# EAGLE board me_433_hw3 (EAGLE 8.7.1)
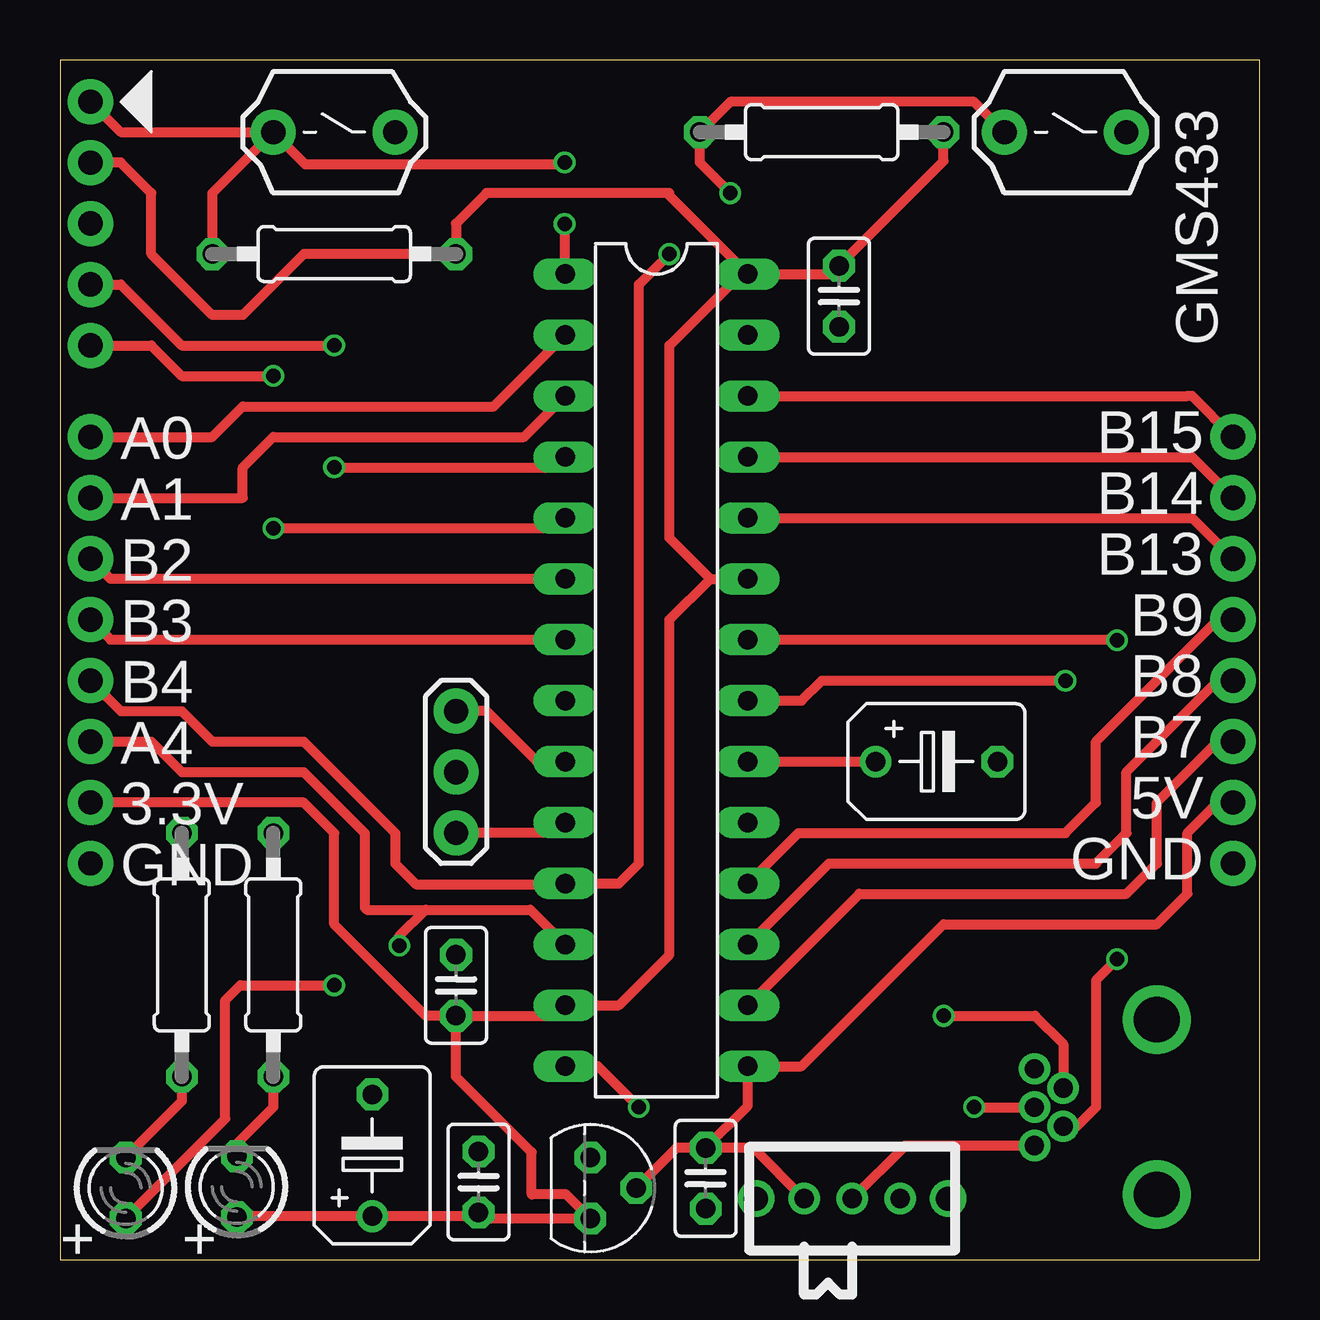
[diagram p0: board, top side]
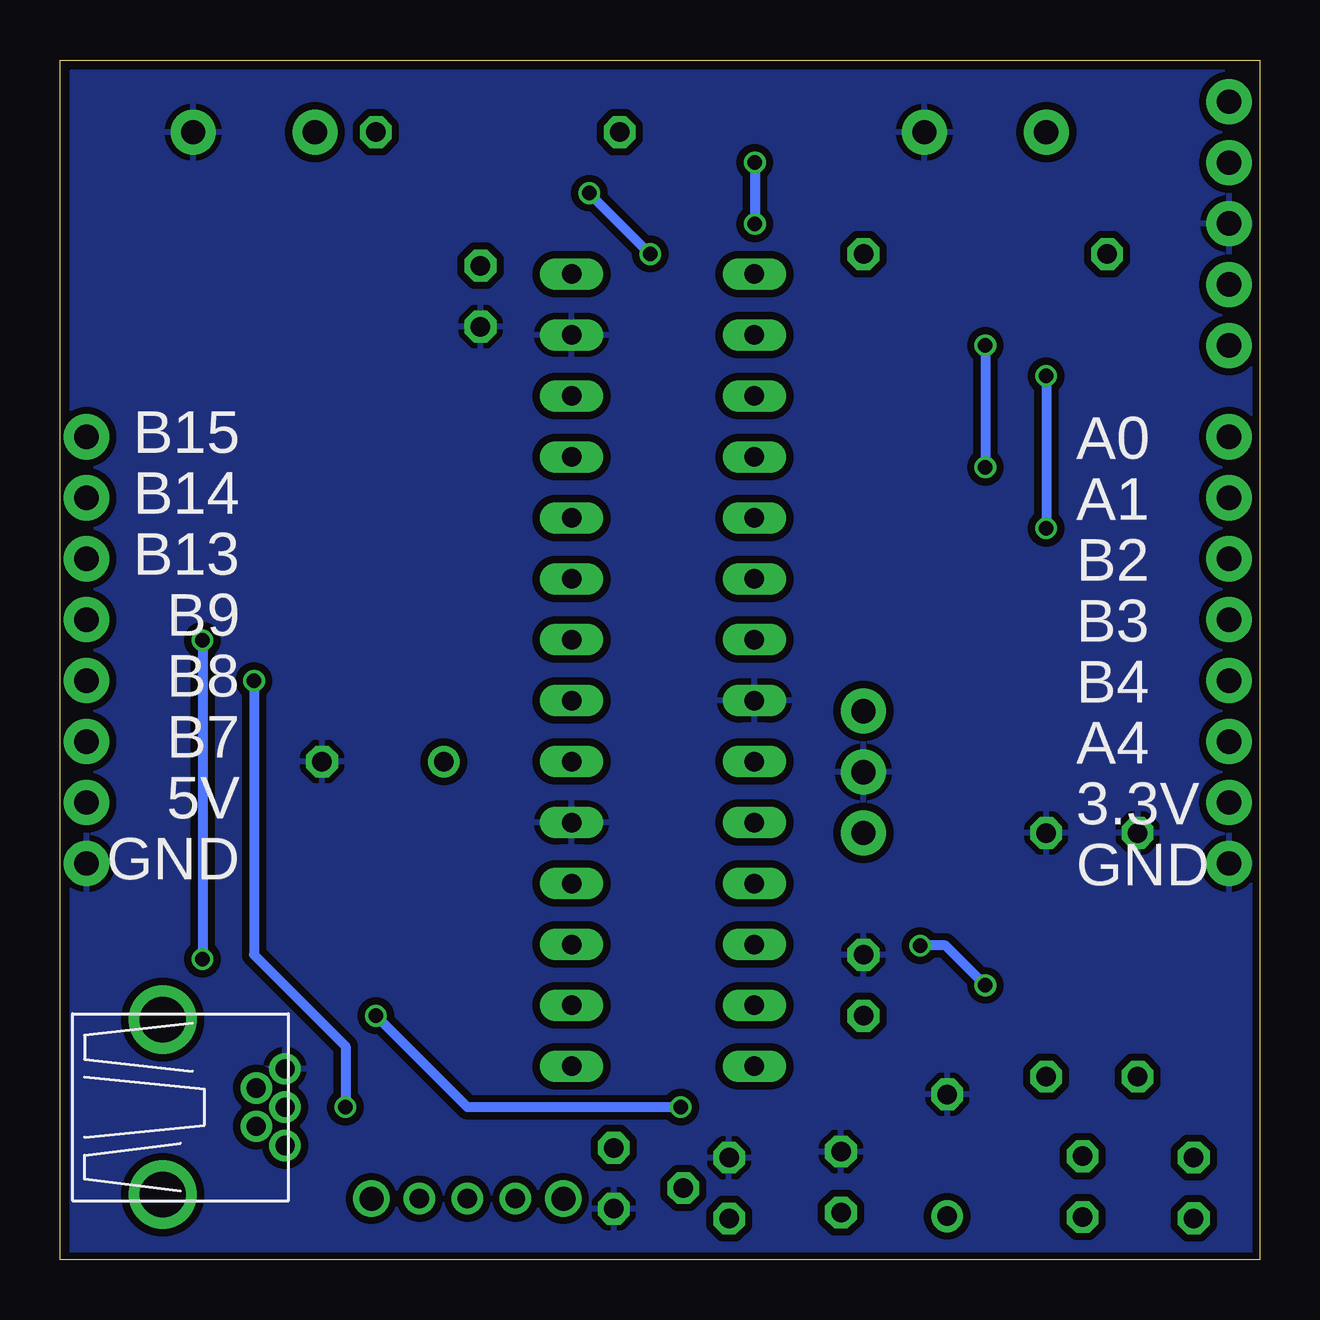
[diagram p1: board, bottom side, seen from below]

Size 50 x 50 mm. Coordinates in mm from the lower left corner, seen from the top.
Outline: 0,0 50,0 50,50 0,50 0,0
Copper layers (1*16): Top 0.035mm / dielectric 1.5mm / Bottom 0.035mm
Design rules "SeeedStudio_2layer_DRU_no_angle_20140221": minimum track width 6mil, minimum drill 12mil, track to track 6mil, track to pad 6mil, pad to pad 6mil, via to via 6mil, smd to smd 0mil, copper to edge 10mil, drill to drill 10mil, minimum pad ring 10mil, minimum via ring 6mil, stop-mask expansion 2mil, vias tented up to drill 100mil, thermal gap 10mil

## Footprints (pad centres in the part's own frame; a part is rotated, then mirrored left to right if it is on the bottom)
C025-025X050 = drill 0.813 octagon: 1 -1.27,0; 2 1.27,0
B45181B = drill 0.813: + -2.54,0 | drill 0.813 octagon: - 2.54,0
USB-MB-H = drill 0.8: D+ 5.1,0; D- 3.9,0.8; GND 5.1,-1.6; ID 3.9,-0.8; VBUS 5.1,1.6 | drill 1.9: P$6 0,-3.65; P$7 0,3.65
1X08 = drill 1.016 pad 1.88: 1 0,0; 2 2.54,0; 3 5.08,0; 4 7.62,0; 5 10.16,0; 6 12.7,0; 7 15.24,0; 8 17.78,0
LED3MM = drill 0.813 octagon: A -1.27,0; K 1.27,0
0207/10 = drill 0.813 octagon: 1 -5.08,0; 2 5.08,0
DIL28-3 = drill 0.813 long: 1 -16.51,-3.81; 2 -13.97,-3.81; 3 -11.43,-3.81; 4 -8.89,-3.81; 5 -6.35,-3.81; 6 -3.81,-3.81; 7 -1.27,-3.81; 8 1.27,-3.81; 9 3.81,-3.81; 10 6.35,-3.81; 11 8.89,-3.81; 12 11.43,-3.81; 13 13.97,-3.81; 14 16.51,-3.81; 15 16.51,3.81; 16 13.97,3.81; 17 11.43,3.81; 18 8.89,3.81; 19 6.35,3.81; 20 3.81,3.81; 21 1.27,3.81; 22 -1.27,3.81; 23 -3.81,3.81; 24 -6.35,3.81; 25 -8.89,3.81; 26 -11.43,3.81; 27 -13.97,3.81; 28 -16.51,3.81
SLIDE = drill 0.8: 1 -2,0; 2 0,0; 3 2,0 | drill 1: P$1 -4,0; P$2 4,0
TO92 = drill 0.813 octagon: 1 -1.27,0; 2 0,1.905; 3 1.27,0
PB = drill 1.016 pad 1.88: 1 0,0; 2 5.08,0
1X05 = drill 1.016 pad 1.88: 1 0,0; 2 2.54,0; 3 5.08,0; 4 7.62,0; 5 10.16,0
OSC = drill 1.016 pad 1.88: 1 0,0; 2 2.54,0; 3 5.08,0

## Placement (x,y rotation side)
C1  0.1uF  [C025-025X050]  32.47,40.16 270 top
C2  0.1uF  [C025-025X050]  16.51,11.43 90 top
C3  0.1uF  [C025-025X050]  26.91,3.38 270 top
C4  0.1uF  [C025-025X050]  17.45,3.23 90 top
C5  10uF  [B45181B]  36.53,20.75 0 top
C6  10uF  [B45181B]  13.02,4.34 90 top
J1  USB-MB-H  [USB-MB-H]  45.72,6.35 180 top
J2  [1X08]  1.27,16.51 90 top
J3  [1X08]  48.9,16.51 90 top
LED1  Red  [LED3MM]  7.37,3.04 90 top
LED2  Green  [LED3MM]  2.74,2.98 90 top
R1  330  [0207/10]  8.89,12.7 270 top
R2  330  [0207/10]  5.08,12.7 270 top
R3  10k  [0207/10]  11.43,41.91 0 top
R4  10k  [0207/10]  31.75,46.99 0 top
U$1  PIC32MX250F128B  [DIL28-3]  24.86,24.57 270 top
U$2  SLIDE  [SLIDE]  33.02,2.54 180 top
U$3  MCP1702  [TO92]  22.11,2.98 270 top
U$4  RESET  [PB]  8.89,46.99 0 top
U$5  USER  [PB]  39.37,46.99 0 top
U$6  PICKIT3  [1X05]  1.27,48.26 270 top
U$7  8MHZ  [OSC]  16.51,22.86 270 top

## Library data of the parts
C1-C6 J1-J3 R1-R4 U$1-U$7 = me_433_hw2_library
LED1 LED2 = led

## Nets
+3V3: C1.1 C2.1 C4.1 C6.+ J2.2 LED1.A R3.2 R4.2 U$1.13 U$1.23 U$1.28 U$3.3 U$6.2
+5V: C3.1 J3.2 U$1.15 U$2.3 U$3.2
A0: J2.8 U$1.2
A1: J2.7 U$1.3
A4/LED: J2.3 LED2.A U$1.12
B2: J2.6 U$1.6
B3: J2.5 U$1.7
B4/USER: J2.4 R4.1 U$1.11 U$5.1
B7: J3.3 U$1.16
B8: J3.4 U$1.17
B9: J3.5 U$1.18
B13: J3.6 U$1.24
B14: J3.7 U$1.25
B15: J3.8 U$1.26
D+: J1.D+ U$1.21
D-: J1.D- U$1.22
GND: C1.2 C2.2 C3.2 C4.2 C5.- C6.- J1.GND J2.1 J3.1 R1.1 R2.1 U$1.8 U$1.19 U$1.27 U$3.1 U$4.2 U$5.2 U$6.3 U$7.2
MCLR: R3.1 U$1.1 U$4.1 U$6.1
N$1: J1.VBUS U$2.2
N$2: U$1.9 U$7.1
N$3: U$1.10 U$7.3
N$4: LED1.K R1.2
N$5: C5.+ U$1.20
N$6: LED2.K R2.2
PGC: U$1.5 U$6.5
PGD: U$1.4 U$6.4
USBID: J1.ID U$1.14

## Tracks (layer width: path | path; a pad name or v marks a point on that pad's centre or on a via)
+3V3
  Top 0.406: LED1.A 7.41,1.8 C6.+ 17.29,1.8 C4.1 17.7,1.71 U$3.3 21.1,2.71 19.66,2.71 19.66,4.47 16.51,7.62 C2.1 | C2.1 20.62,10.16 U$1.13 23.3,10.6 25.4,12.7 25.4,26.67 27.11,28.38 | C2.1 15.24,10.16 11.43,13.97 11.43,17.78 10.16,19.05 J2.2 | 27.11,28.38 U$1.23 | 27.11,28.38 25.4,30.08 25.4,38.1 28.38,41.08 U$1.28 | U$1.28 32.12,41.08 C1.1 36.83,45.78 R4.2 | U$6.2 2.54,45.72 3.81,44.45 3.81,41.91 6.35,39.37 7.62,39.37 10.16,41.91 R3.2 16.51,43.18 17.78,44.45 25.4,44.45 25.4,44.35 U$1.28
+5V
  Top 0.406: U$2.3 28.91,4.66 C3.1 | C3.1 25.7,4.66 U$3.2 | C3.1 28.68,6.42 U$1.15 30.91,8.05 36.83,13.97 45.72,13.97 46.99,15.24 46.99,17.78 48.26,19.05 48.78,19.05 J3.2
A0
  Top 0.406: J2.8 6.35,34.29 7.62,35.56 18.08,35.56 U$1.2
A1
  Top 0.406: J2.7 7.62,31.75 7.62,33.02 8.89,34.29 19.35,34.29 U$1.3
A4/LED  (via drill 0.6)
  Top 0.406: J2.3 3.81,21.59 5.08,20.32 10.16,20.32 12.7,17.78 12.7,14.67 12.79,14.58 15.24,14.58 | 15.24,14.58 19.61,14.58 U$1.12 | LED2.A 6.89,5.87 6.89,10.81 7.51,11.43 v11.43,11.43 | v14.14,13.09 14.14,13.48 15.24,14.58
  Bottom 0.406: v11.43,11.43 13.09,13.09 v14.14,13.09
B2
  Top 0.406: U$1.6 2.1,28.38 J2.6
B3
  Top 0.406: J2.5 2.1,25.84 U$1.7
B4/USER  (via drill 0.6)
  Top 0.406: U$5.1 38.1,48.26 27.94,48.26 R4.1 26.67,45.72 v27.94,44.45 | J2.4 2.54,22.86 5.08,22.86 6.35,21.59 10.16,21.59 13.97,17.78 13.97,16.51 14.84,15.64 21.02,15.64 U$1.11 23.3,15.68 24.13,16.51 24.13,40.64 v25.4,41.91
  Bottom 0.406: v25.4,41.91 v27.94,44.45
B7
  Top 0.406: U$1.16 33.32,15.24 44.45,15.24 45.72,16.51 45.72,19.05 48.26,21.59 48.78,21.59 J3.3
B8
  Top 0.406: U$1.17 32.05,16.51 43.18,16.51 44.45,17.78 44.45,20.32 48.26,24.13 48.78,24.13 J3.4
B9
  Top 0.406: U$1.18 30.78,17.78 41.91,17.78 43.18,19.05 43.18,21.59 48.26,26.67 48.78,26.67 J3.5
B13
  Top 0.406: U$1.24 47.19,30.91 48.78,29.32 J3.6
B14
  Top 0.406: U$1.25 47.19,33.45 48.78,31.86 J3.7
B15
  Top 0.406: U$1.26 46.99,35.99 47.19,35.99 J3.8
D+  (via drill 0.6)
  Top 0.406: U$1.21 30.91,23.3 31.75,24.13 v41.91,24.13 | v38.1,6.35 J1.D+
  Bottom 0.406: v41.91,24.13 41.91,12.7 38.1,8.89 v38.1,6.35
D-  (via drill 0.6)
  Top 0.406: U$1.22 44.04,25.84 v44.06,25.82 | v44.06,12.52 43.18,11.63 43.18,6.35 42.38,5.55 J1.D-
  Bottom 0.406: v44.06,25.82 v44.06,12.52
GND
  pour Bottom (isolate 0.305): 0,49.53 0,0 49.53,0 49.53,49.53
MCLR  (via drill 0.6)
  Top 0.406: U$6.1 2.54,46.99 U$4.1 | U$4.1 6.35,44.45 R3.1 | U$4.1 10.22,45.66 21.11,45.66 v21.04,45.73 | v21.04,43.16 21.04,41.09 U$1.1
  Bottom 0.406: v21.04,45.73 v21.04,43.16
N$1
  Top 0.406: J1.VBUS 35.23,4.75 U$2.2
N$2
  Top 0.406: U$1.9 19.89,20.75 17.78,22.86 U$7.1
N$3
  Top 0.406: U$1.10 21.16,18.21 21.59,17.78 U$7.3
N$4
  Top 0.406: R1.2 8.89,6.35 7.37,4.83 LED1.K
N$5
  Top 0.406: U$1.20 C5.+
N$6
  Top 0.406: R2.2 5.08,6.59 LED2.K
PGC  (via drill 0.6)
  Top 0.406: U$6.5 3.81,38.1 5.08,36.83 v8.89,36.83 | U$1.5 20.62,30.48 v8.89,30.48
  Bottom 0.406: v8.89,36.83 v8.89,30.48
PGD  (via drill 0.6)
  Top 0.406: U$6.4 2.54,40.64 5.08,38.1 v11.43,38.1 | U$1.4 20.62,33.02 v11.43,33.02
  Bottom 0.406: v11.43,38.1 v11.43,33.02
USBID  (via drill 0.6)
  Top 0.406: U$1.14 22.43,8.05 v24.13,6.35 | v36.83,10.16 40.64,10.16 41.82,8.98 J1.ID
  Bottom 0.406: v24.13,6.35 33.02,6.35 v36.83,10.16

## Text on the board
tPlace: GMS433 | B15 | A0 | B14 | A1 | B13 | B2 | B9 | B3 | B8 | B4 | B7 | A4 | 5V | 3.3V | GND | GND | + | +
bPlace: B15 | A0 | B14 | A1 | B13 | B2 | B9 | B3 | B8 | B4 | B7 | A4 | 5V | 3.3V | GND | GND